# Altium PCB ArduinoAndSensorsPCB.PcbDoc
Units mil, origin at the board's own origin, x right, y up, seen from the top; angles counter-clockwise.
Board outline 2100 x 4000 mil, 2 copper layers (Top Layer, Bottom Layer); 3 components, 8 nets, 100 pads, 0 vias.
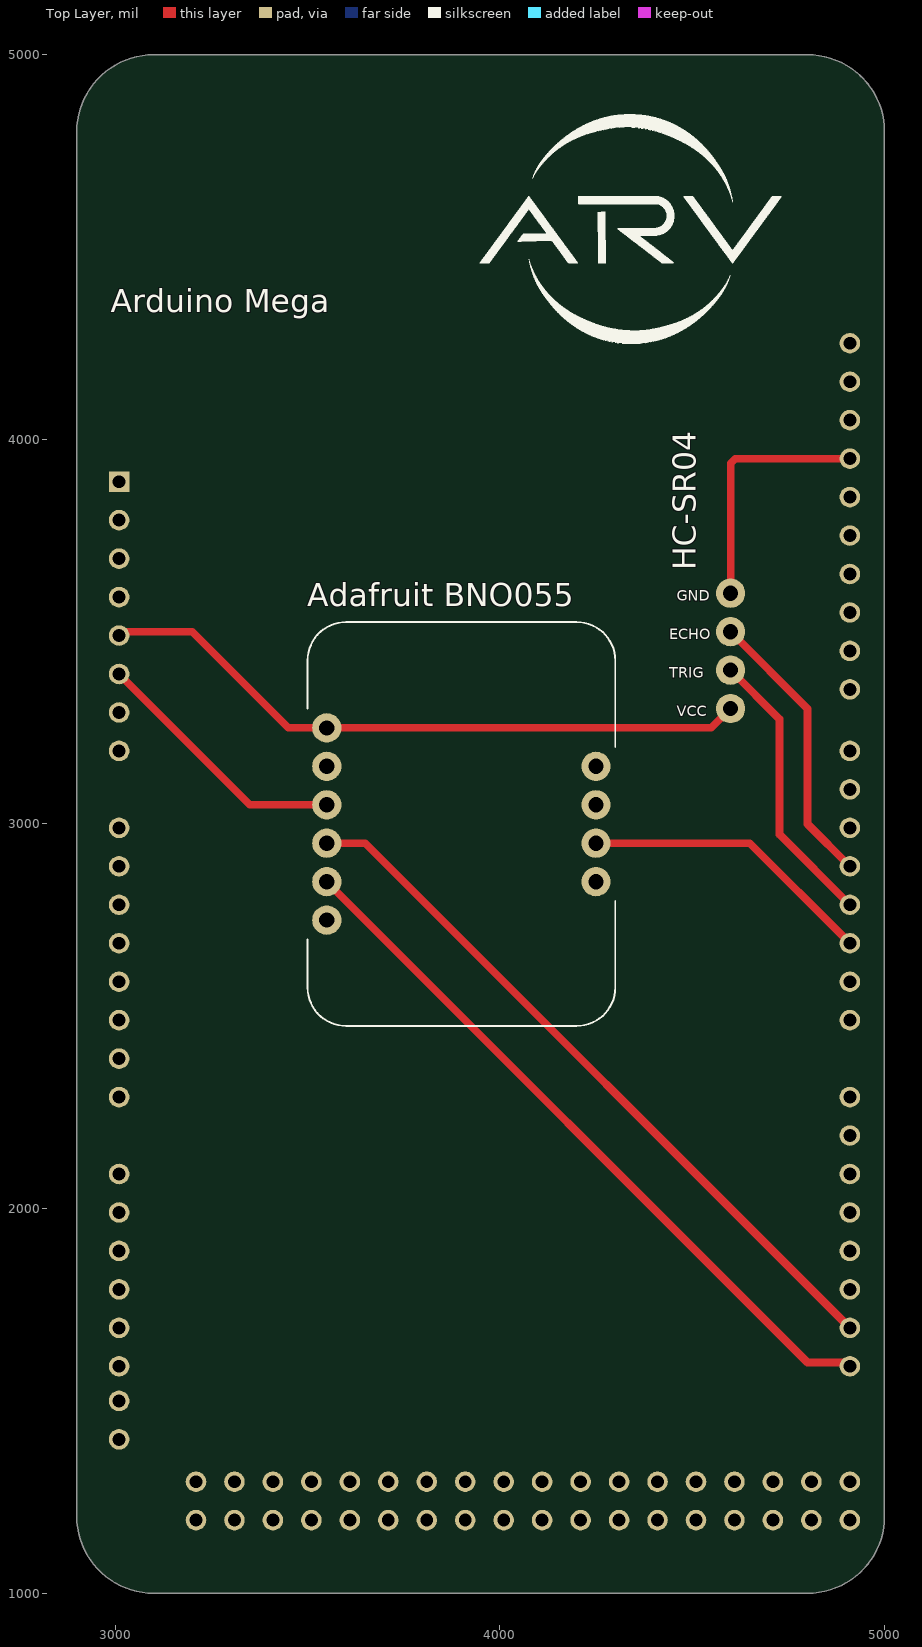
[diagram p0: Top Layer view]
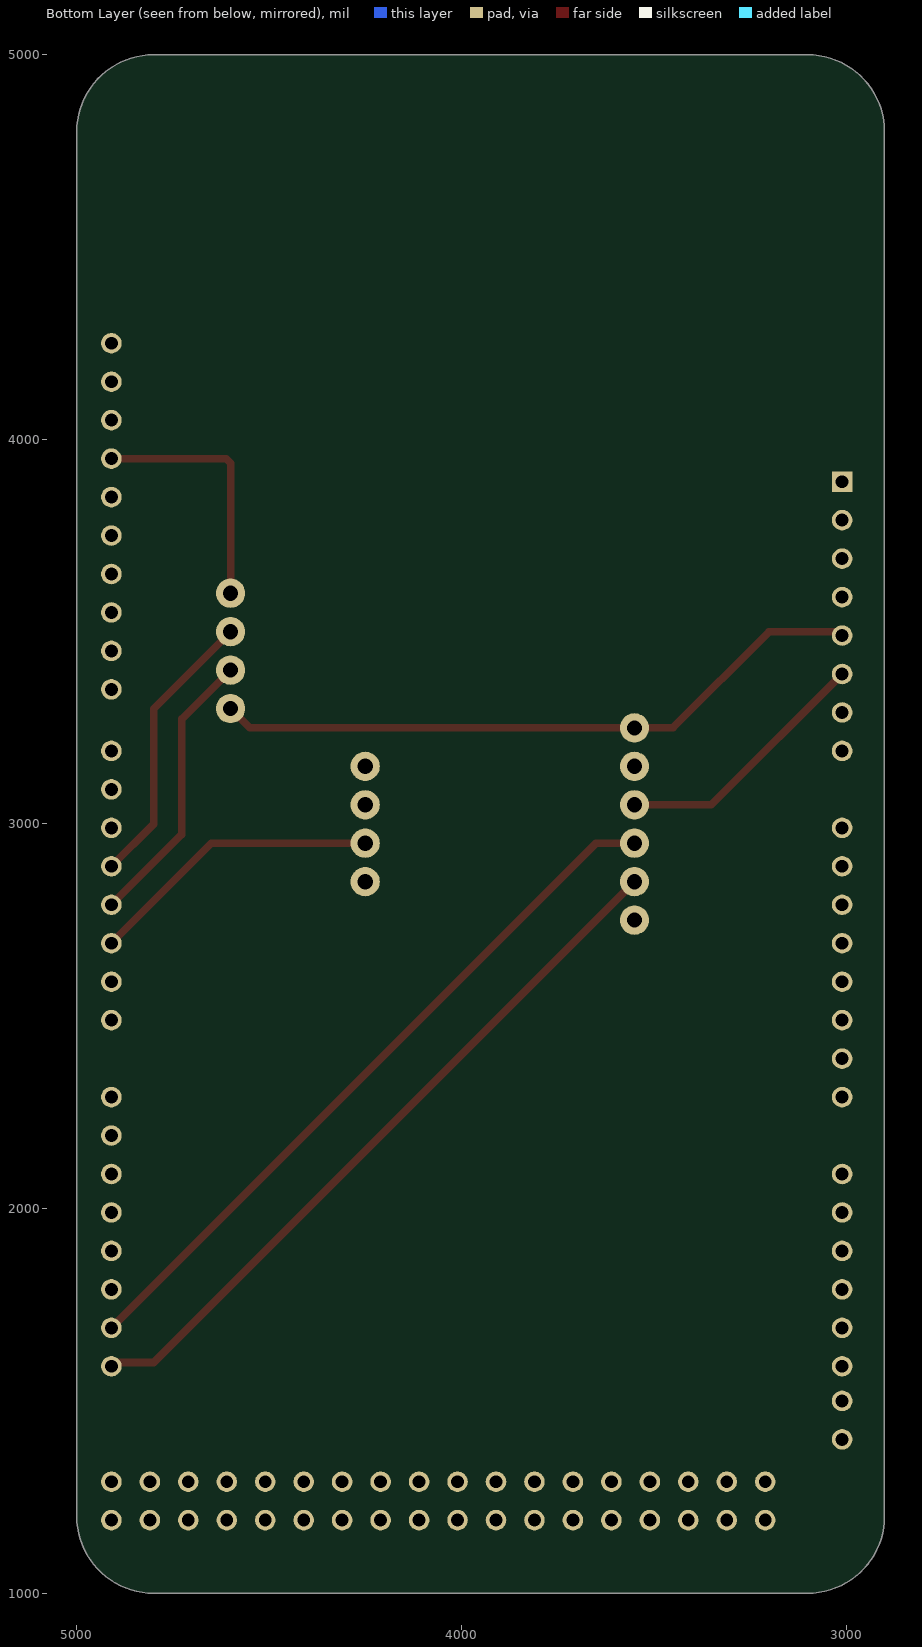
[diagram p1: Bottom Layer view, seen from below]

## Layer stack, top to bottom
Top Solder: solder mask 0.4, Solder Resist, Dk 3.5
Top Layer: signal copper 1.4
Dielectric 1: dielectric 12.6, FR-4, Dk 4.8
Bottom Layer: signal copper 1.4
Bottom Solder: solder mask 0.4, Solder Resist, Dk 3.5

## Board outline
2900,1200 2900,4799.8 cw(c3100.1,4799.9) 3100.1,5000 4799.8,5000 cw(c4800,4800) 5000,4800 5000,1200 cw(c4800,1200) 4800,1000 3100,1000 cw(c3100,1200)

## Design rules (kind name [scope] priority, off if disabled: settings)
Clearance [All] p1: gap=10 ignorepadtopadclearanceinfootprint=FALSE
PolygonConnect [All] p1: connectstyle=Relief reliefconductorwidth=10 reliefentries=4 polygonreliefangle="90 Angle" airgapwidth=10
RoutingVias [All] p1: holewidth=28 width=50 viastyle="Through Hole" minholewidth=28 minwidth=50 maxholewidth=28 maxwidth=50
SolderMaskExpansion [All] p1: expansion=4 istentingtop=FALSE
SupplyNets "Schematic Supply Nets_2" [InNet('GND1')] p1: voltage=0.000
SupplyNets "Schematic Supply Nets_1" [InNet('GND3')] p2: voltage=0.000
Width [All] p1: maxlimit=40 minlimit=10 preferedwidth=20
30 further rules are at their usual default settings.

## Components (designator, comment, footprint, x,y, rotation, side; value= is the part's Value field where it differs from the comment)
"Adafruit BNO055" "2472" MODULE_2472 3900,3000 r270 top (schematic designator U?)
"Arduino Mega" "ARDUINO MEGA" ARDUINO_A000067 3960,2990 r0 top (schematic designator "Arduino Mega?")
HC-SR04 "HC-SR04" PCBComponent_1 4370,3410 r270 top (schematic designator HC-SR?)

## Footprints (in the part's own frame and the unit in brackets; to place one, negate y for a bottom-side part, rotate by r counter-clockwise, add the part's x,y. Pads: shape width x height; smd on the part's side, far side on the other; paste and mask are expansions set on the pad)
ARDUINO_A000067 [mm]
  round 1.358 hole 0.85: 0(24.13,-12.7) 1(24.13,-10.16) 2(24.13,-7.62) 3(24.13,-5.08) 3V3(-24.13,15.24) 4(24.13,-2.54) 5(24.13,0) 5V_1(-24.13,12.7) 5V_2(24.13,-43.18) 5V_3(24.13,-45.72) 6(24.13,2.54) 7(24.13,5.08) 8(24.13,9.144) 9(24.13,11.684) 10(24.13,14.224) 11(24.13,16.764) 12(24.13,19.304) 13(24.13,21.844) 14(24.13,-17.78) 15(24.13,-20.32) 16(24.13,-22.86) 17(24.13,-25.4) 18(24.13,-27.94) 19(24.13,-30.48) 20(24.13,-33.02) 21(24.13,-35.56) 22(21.59,-43.18) 23(21.59,-45.72) 24(19.05,-43.18) 25(19.05,-45.72) 26(16.51,-43.18) 27(16.51,-45.72) 28(13.97,-43.18) 29(13.97,-45.72) 30(11.43,-43.18) 31(11.43,-45.72) 32(8.89,-43.18) 33(8.89,-45.72) 34(6.35,-43.18) 35(6.35,-45.72) 36(3.81,-43.18) 37(3.81,-45.72) 38(1.27,-43.18) 39(1.27,-45.72) 40(-1.27,-43.18) 41(-1.27,-45.72) 42(-3.81,-43.18) 43(-3.81,-45.72) 44(-6.35,-43.18) 45(-6.35,-45.72) 46(-8.89,-43.18) 47(-8.89,-45.72) 48(-11.43,-43.18) 49(-11.43,-45.72) 50(-13.97,-43.18) 51(-13.97,-45.72) 52(-16.51,-43.18) 53(-16.51,-45.72) AD0(-24.13,0) AD1(-24.13,-2.54) AD2(-24.13,-5.08) AD3(-24.13,-7.62) AD4(-24.13,-10.16) AD5(-24.13,-12.7) AD6(-24.13,-15.24) AD7(-24.13,-17.78) AD8(-24.13,-22.86) AD9(-24.13,-25.4) AD10(-24.13,-27.94) AD11(-24.13,-30.48) AD12(-24.13,-33.02) AD13(-24.13,-35.56) AD14(-24.13,-37.846) AD15(-24.13,-40.386) AREF(24.13,26.924) GND1(-24.13,10.16) GND2(-24.13,7.62) GND3(24.13,24.384) GND4(-19.05,-43.18) GND5(-19.05,-45.72) IOREF(-24.13,20.32) RESET(-24.13,17.78) SCL(24.13,32.004) SDA(24.13,29.464) VIN(-24.13,5.08)
  rect 1.358x1.358 / inner round 1.358 / far side rect 1.358x1.358 hole 0.85: NC(-24.13,22.86)
MODULE_2472 [mil]
  round 76 hole 39.37: 1(-250,-350) 2(-150,-350) 3(-50,-350) 4(50,-350) 5(150,-350) 6(250,-350) 7(150,350) 8(50,350) 9(-50,350) 10(-150,350)
  silkscreen extent -525,-400 525,400, body extent -525,-400 525,400, height 167
PCBComponent_1 [mil]
  round 76 hole 39.37: 1(-190,230) 2(-90,230) 3(10,230) 4(110,230)

## Part data
"Adafruit BNO055": "Adafruit 9-DOF Absolute Orientation IMU Fusion Breakout - BNO055", Package="Non-Standard Adafruit", Check_prices=https://www.snapeda.com/parts/2472/Adafruit+Industries/view-part/?ref=eda, MF=Adafruit, MP=2472, SnapEDA_Link=https://www.snapeda.com/parts/2472/Adafruit+Industries/view-part/?ref=snap
"Arduino Mega": library part A000067, "8-bit board with 54 digital pins, 16 analog inputs, and 4 serial ports.", Package="Non-Standard Arduino", Check_prices=https://www.snapeda.com/parts/Arduino%20Mega%202560%20Rev3/Arduino/view-part/?ref=eda, MF=Arduino, MP="Arduino Mega 2560 Rev3", SnapEDA_Link=https://www.snapeda.com/parts/Arduino%20Mega%202560%20Rev3/Arduino/view-part/?ref=snap
HC-SR04: library part Component_1

## Nets (pads, with @x,y where several pads share a name; then routed paths per layer and width w, separated by ;. In a path a pad name is that pad's centre, name@x,y a point inside that pad or via, vN(x,y) a via of type N, cw(c..) or ccw(c..) an arc to the next point about the centre after c; other vN are vias at no path point)
5V: "Adafruit BNO055.1" "Arduino Mega.5V_1" HC-SR04.4 | length 1724.3
  Top Layer w20: 3000,3500 3200,3500 3450,3250 3550,3250 4550,3250 HC-SR04.4
GND1: "Adafruit BNO055.3" "Arduino Mega.GND1" | length 695
  Top Layer w20: 3000,3400 3350,3050 3550,3050
GND3: "Arduino Mega.GND3" HC-SR04.1 | length 653.1
  Top Layer w20: HC-SR04.1 4600,3938.28 4611.72,3950 4910,3950
"NetArduino Mega?_2": "Adafruit BNO055.8" "Arduino Mega.2" | length 753.6
  Top Layer w20: 4250,2950 4650,2950 4900,2700
"NetArduino Mega?_3": "Arduino Mega.3" HC-SR04.3 | length 738.4
  Top Layer w20: HC-SR04.3 4727.16,3272.84 4727.16,2972.84 4910,2790
"NetArduino Mega?_4": "Arduino Mega.4" HC-SR04.2 | length 738.4
  Top Layer w20: HC-SR04.2 4800,3300 4800,3000 4910,2890
"NetArduino Mega?_20": "Adafruit BNO055.4" "Arduino Mega.20" | length 1867.8
  Top Layer w20: 3550,2950 3650,2950 4900,1700
"NetArduino Mega?_21": "Adafruit BNO055.5" "Arduino Mega.21" | length 1867.8
  Top Layer w20: 3550,2850 4800,1600 4900,1600
pads on no net: "Adafruit BNO055.2" "Adafruit BNO055.6" "Adafruit BNO055.7" "Adafruit BNO055.9" "Adafruit BNO055.10" "Arduino Mega.0" "Arduino Mega.1" "Arduino Mega.3V3" "Arduino Mega.5" "Arduino Mega.5V_2" "Arduino Mega.5V_3" "Arduino Mega.6" "Arduino Mega.7" "Arduino Mega.8" "Arduino Mega.9" "Arduino Mega.10" "Arduino Mega.11" "Arduino Mega.12" "Arduino Mega.13" "Arduino Mega.14" "Arduino Mega.15" "Arduino Mega.16" "Arduino Mega.17" "Arduino Mega.18" "Arduino Mega.19" "Arduino Mega.22" "Arduino Mega.23" "Arduino Mega.24" "Arduino Mega.25" "Arduino Mega.26" "Arduino Mega.27" "Arduino Mega.28" "Arduino Mega.29" "Arduino Mega.30" "Arduino Mega.31" "Arduino Mega.32" "Arduino Mega.33" "Arduino Mega.34" "Arduino Mega.35" "Arduino Mega.36" "Arduino Mega.37" "Arduino Mega.38" "Arduino Mega.39" "Arduino Mega.40" "Arduino Mega.41" "Arduino Mega.42" "Arduino Mega.43" "Arduino Mega.44" "Arduino Mega.45" "Arduino Mega.46" "Arduino Mega.47" "Arduino Mega.48" "Arduino Mega.49" "Arduino Mega.50" "Arduino Mega.51" "Arduino Mega.52" "Arduino Mega.53" "Arduino Mega.AD0" "Arduino Mega.AD1" "Arduino Mega.AD2" "Arduino Mega.AD3" "Arduino Mega.AD4" "Arduino Mega.AD5" "Arduino Mega.AD6" "Arduino Mega.AD7" "Arduino Mega.AD8" "Arduino Mega.AD9" "Arduino Mega.AD10" "Arduino Mega.AD11" "Arduino Mega.AD12" "Arduino Mega.AD13" "Arduino Mega.AD14" "Arduino Mega.AD15" "Arduino Mega.AREF" "Arduino Mega.GND2" "Arduino Mega.GND4" "Arduino Mega.GND5" "Arduino Mega.IOREF" "Arduino Mega.NC" "Arduino Mega.RESET" "Arduino Mega.SCL" "Arduino Mega.SDA" "Arduino Mega.VIN"

## Silkscreen, mask and mechanical layers (free items; w line width, h text height)
Top Overlay:
  drawing of 10 lines, arcs and shapes, not listed

## Text inside footprints (layer, text, board x,y; h text height)
"Adafruit BNO055": Mechanical 7 "3vo" at 3603.14,3188.65 h27.2 r270; Mechanical 7 "RST" at 3603.14,2783.14 h27.2 r270; Mechanical 7 "SCL" at 3603.14,2884.72 h27.2 r270; Mechanical 7 "SDA" at 3603.14,2984.72 h27.2 r270; Mechanical 7 "GND" at 3603.14,3084.72 h27.2 r270; Mechanical 7 "Vin" at 3603.14,3283.75 h27.2 r270; Mechanical 7 "PS0" at 4163.14,3189.72 h27.2 r270; Mechanical 7 "ADR" at 4163.14,2884.17 h27.2 r270; Mechanical 7 "PS1" at 4163.14,3085.19 h27.2 r270; Mechanical 7 "INT" at 4165.03,2981.23 h27.2 r270
HC-SR04: Top Overlay "VCC" at 4460,3280 h27.2; Top Overlay "GND" at 4460,3580 h27.2; Top Overlay "ECHO" at 4440,3480 h27.2; Top Overlay "TRIG" at 4440,3380 h27.2